# Altium PCB SparkFun_STUSB4500_USB-PD.PcbDoc
Units mm, origin at the board's own origin, x right, y up, seen from the top; angles counter-clockwise.
Board outline 35.56 x 33.02 mm, 2 copper layers (Top, Bottom); 76 components, 30 nets, 162 pads, 46 vias.
Unrouted connection lines stored in the file: 2.
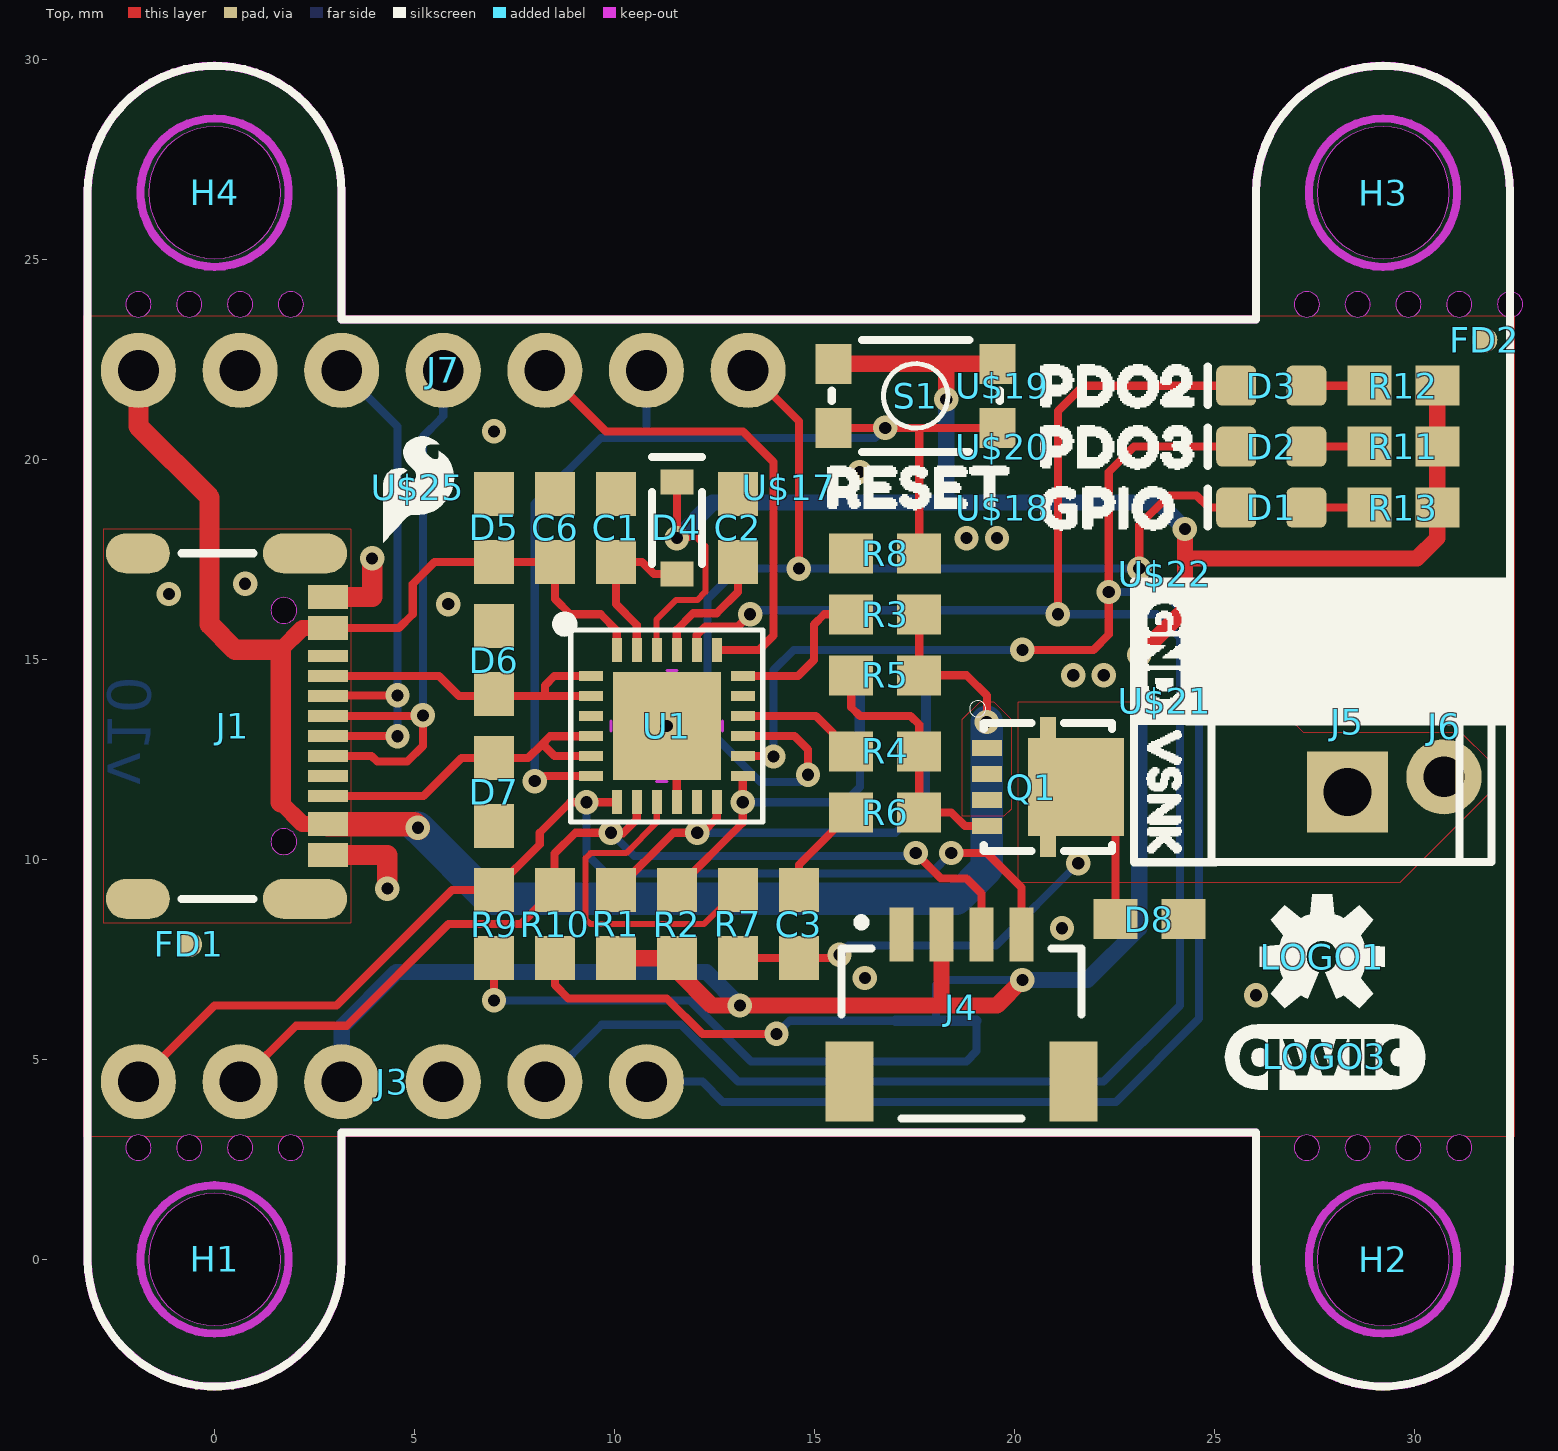
[diagram p0: Top view]
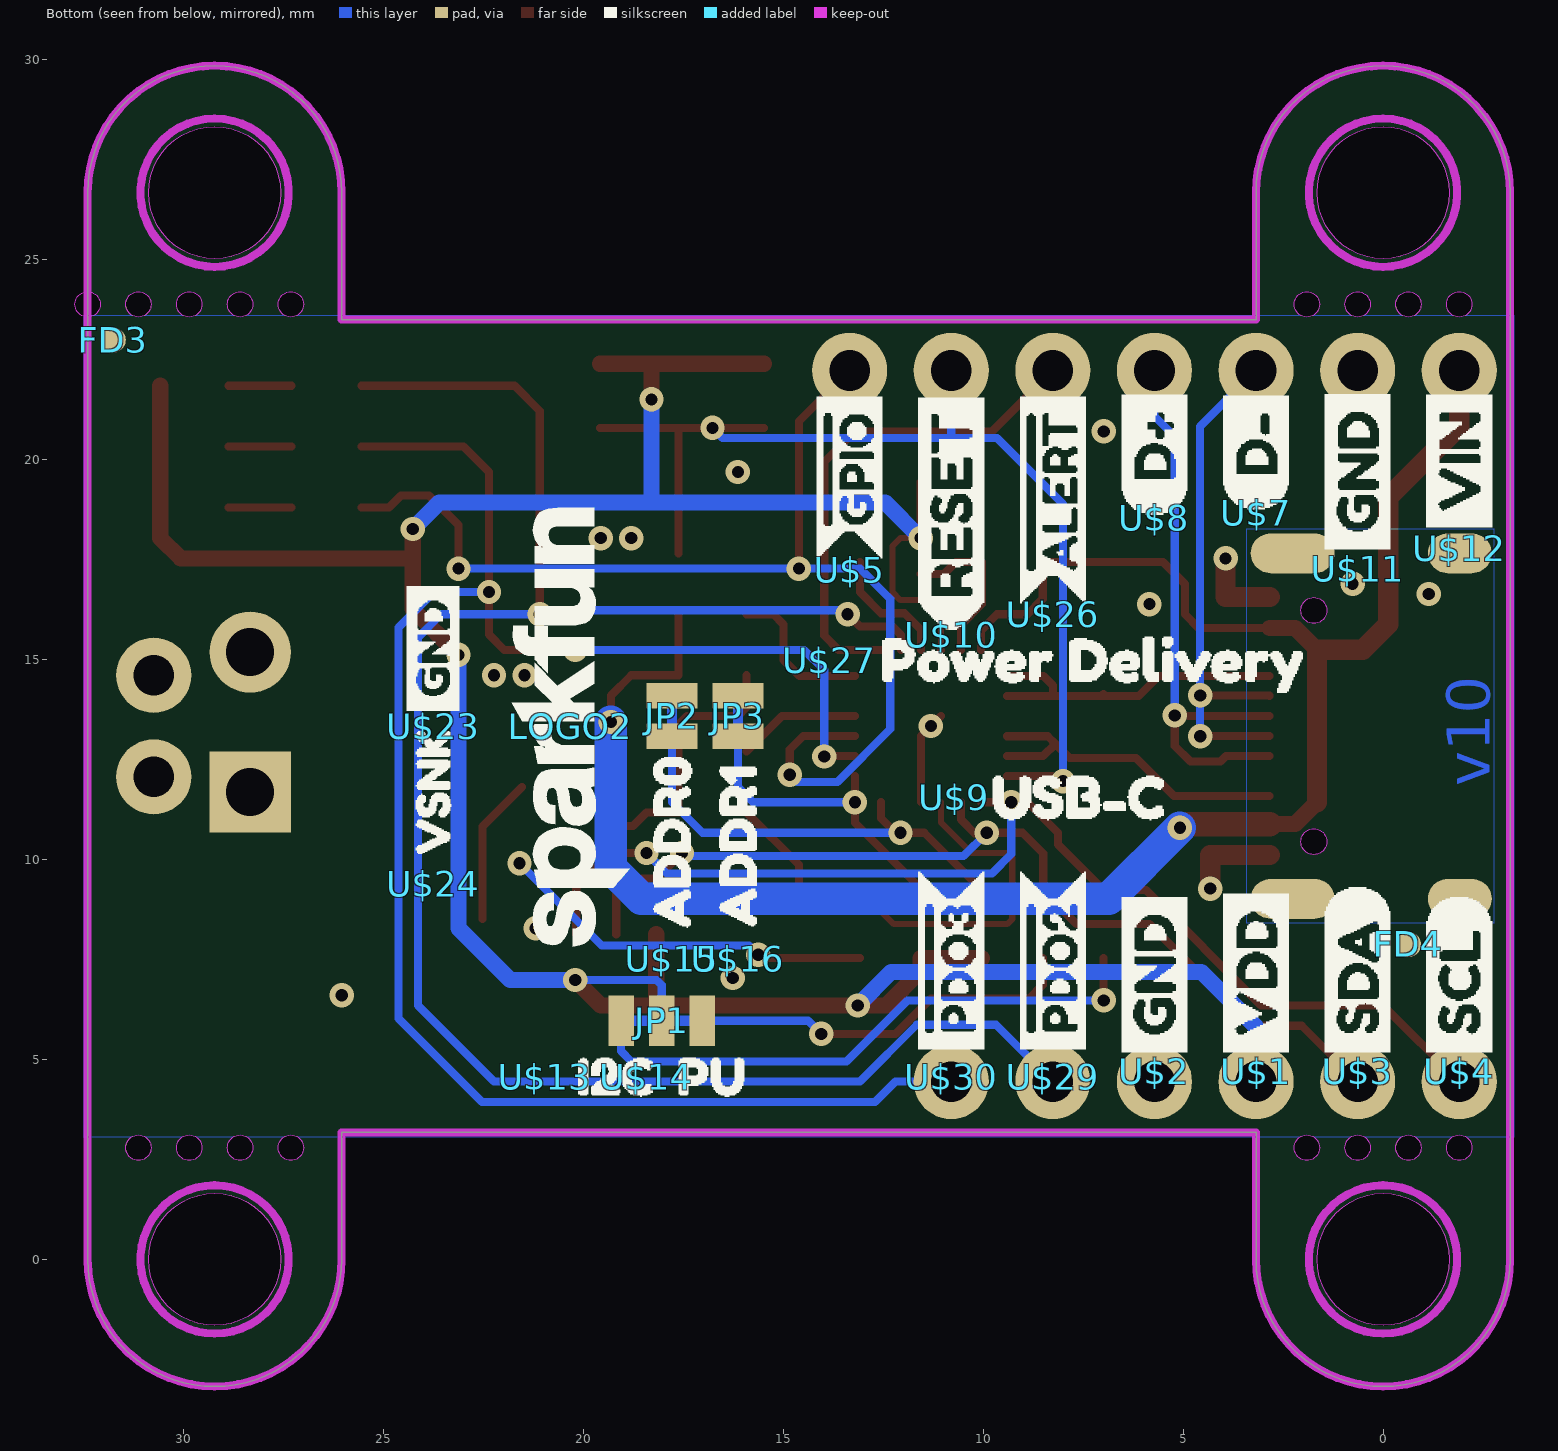
[diagram p1: Bottom view, seen from below]

## Layer stack, top to bottom
Top Solder: solder mask 0.0102, Solder Resist, Dk 3.5
Top: signal copper 0.035
Dielectric 1: dielectric 0.32, FR-4, Dk 4.8
Bottom: signal copper 0.035
Bottom Solder: solder mask 0.0102, Solder Resist, Dk 3.5

## Board outline
26.035,3.175 3.175,3.175 3.175,0 cw(c0,0) 0,-3.175 cw(c0,0) -3.175,0 -3.175,26.67 cw(c0,26.67) 0,29.845 cw(c0,26.67) 3.175,26.67 3.175,23.495 26.035,23.495 26.035,26.67 cw(c29.21,26.67) 29.21,29.845 cw(c29.21,26.67) 32.385,26.67 32.385,0 cw(c29.21,0) 29.21,-3.175 cw(c29.21,0) 26.035,0
cut-out: 0,-1.651 ccw(c0,0) 1.651,0 ccw(c0,0) 0,1.651 ccw(c0,0) -1.651,0 ccw(c0,0)
cut-out: 29.21,-1.651 ccw(c29.21,0) 30.861,0 ccw(c29.21,0) 29.21,1.651 ccw(c29.21,0) 27.559,0 ccw(c29.21,0)
cut-out: 0,25.019 ccw(c0,26.67) 1.651,26.67 ccw(c0,26.67) 0,28.321 ccw(c0,26.67) -1.651,26.67 ccw(c0,26.67)
cut-out: 29.21,25.019 ccw(c29.21,26.67) 30.861,26.67 ccw(c29.21,26.67) 29.21,28.321 ccw(c29.21,26.67) 27.559,26.67 ccw(c29.21,26.67)
cut-out: 1.73,15.9 ccw(c1.73,16.225) 2.055,16.225 ccw(c1.73,16.225) 1.73,16.55 ccw(c1.73,16.225) 1.405,16.225 ccw(c1.73,16.225)
cut-out: 1.73,10.12 ccw(c1.73,10.445) 2.055,10.445 ccw(c1.73,10.445) 1.73,10.77 ccw(c1.73,10.445) 1.405,10.445 ccw(c1.73,10.445)
cut-out: 28.575,23.558 ccw(c28.575,23.876) 28.892,23.876 ccw(c28.575,23.876) 28.575,24.194 ccw(c28.575,23.876) 28.258,23.876 ccw(c28.575,23.876)
cut-out: -1.905,23.558 ccw(c-1.905,23.876) -1.587,23.876 ccw(c-1.905,23.876) -1.905,24.194 ccw(c-1.905,23.876) -2.222,23.876 ccw(c-1.905,23.876)
cut-out: 29.845,23.558 ccw(c29.845,23.876) 30.162,23.876 ccw(c29.845,23.876) 29.845,24.194 ccw(c29.845,23.876) 29.527,23.876 ccw(c29.845,23.876)
cut-out: 27.305,23.558 ccw(c27.305,23.876) 27.622,23.876 ccw(c27.305,23.876) 27.305,24.194 ccw(c27.305,23.876) 26.987,23.876 ccw(c27.305,23.876)
cut-out: 31.115,23.558 ccw(c31.115,23.876) 31.432,23.876 ccw(c31.115,23.876) 31.115,24.194 ccw(c31.115,23.876) 30.797,23.876 ccw(c31.115,23.876)
cut-out: 32.385,23.558 ccw(c32.385,23.876) 32.703,23.876 ccw(c32.385,23.876) 32.385,24.194 ccw(c32.385,23.876) 32.067,23.876 ccw(c32.385,23.876)
cut-out: 1.905,2.476 ccw(c1.905,2.794) 2.222,2.794 ccw(c1.905,2.794) 1.905,3.111 ccw(c1.905,2.794) 1.587,2.794 ccw(c1.905,2.794)
cut-out: 29.845,2.476 ccw(c29.845,2.794) 30.162,2.794 ccw(c29.845,2.794) 29.845,3.111 ccw(c29.845,2.794) 29.527,2.794 ccw(c29.845,2.794)
cut-out: 0.635,2.476 ccw(c0.635,2.794) 0.953,2.794 ccw(c0.635,2.794) 0.635,3.111 ccw(c0.635,2.794) 0.318,2.794 ccw(c0.635,2.794)
cut-out: -0.635,2.476 ccw(c-0.635,2.794) -0.318,2.794 ccw(c-0.635,2.794) -0.635,3.111 ccw(c-0.635,2.794) -0.953,2.794 ccw(c-0.635,2.794)
cut-out: -1.905,2.476 ccw(c-1.905,2.794) -1.587,2.794 ccw(c-1.905,2.794) -1.905,3.111 ccw(c-1.905,2.794) -2.222,2.794 ccw(c-1.905,2.794)
cut-out: 28.575,2.476 ccw(c28.575,2.794) 28.892,2.794 ccw(c28.575,2.794) 28.575,3.111 ccw(c28.575,2.794) 28.258,2.794 ccw(c28.575,2.794)
cut-out: -0.635,23.558 ccw(c-0.635,23.876) -0.318,23.876 ccw(c-0.635,23.876) -0.635,24.194 ccw(c-0.635,23.876) -0.953,23.876 ccw(c-0.635,23.876)
cut-out: 0.635,23.558 ccw(c0.635,23.876) 0.953,23.876 ccw(c0.635,23.876) 0.635,24.194 ccw(c0.635,23.876) 0.318,23.876 ccw(c0.635,23.876)
cut-out: 1.905,23.558 ccw(c1.905,23.876) 2.222,23.876 ccw(c1.905,23.876) 1.905,24.194 ccw(c1.905,23.876) 1.587,23.876 ccw(c1.905,23.876)
cut-out: 27.305,2.476 ccw(c27.305,2.794) 27.622,2.794 ccw(c27.305,2.794) 27.305,3.111 ccw(c27.305,2.794) 26.987,2.794 ccw(c27.305,2.794)
cut-out: 31.115,2.476 ccw(c31.115,2.794) 31.432,2.794 ccw(c31.115,2.794) 31.115,3.111 ccw(c31.115,2.794) 30.797,2.794 ccw(c31.115,2.794)

## Design rules (kind name [scope] priority, off if disabled: settings)
BoardOutlineClearance mdCopperDimension [All] p1: gap=0.254 ignorepadtopadclearanceinfootprint=FALSE except(0: Arc-SplitContinuation Track-SplitContinuation SMDPad-SplitContinuation THPad-SplitContinuation Via-SplitContinuation Fill-SplitContinuation Poly-SplitContinuation Region-SplitContinuation Text-SplitContinuation; 0.102: Poly-OutlineEdge Poly-CavityEdge Poly-CutoutEdge Poly-SplitBarrior)
Clearance Clearance_for_PolygonClass_Isolate_8 [InPolygonClass('Isolate_8') vs IsArc Or IsTrack Or IsPad Or IsVia Or IsFill Or IsRegion Or IsText] p1: gap=0.203 ignorepadtopadclearanceinfootprint=FALSE
Clearance Clearance_for_PolygonClass_Isolate_6 [InPolygonClass('Isolate_6') vs IsArc Or IsTrack Or IsPad Or IsVia Or IsFill Or IsRegion Or IsText] p2: gap=0.152 ignorepadtopadclearanceinfootprint=FALSE
Clearance "Clearance (Same Net)" [All] p3: gap=0.102 ignorepadtopadclearanceinfootprint=FALSE
Clearance [All] p4: gap=0.102 ignorepadtopadclearanceinfootprint=FALSE
HoleSize [All] p1: absolutevalues=TRUE maxlimit=2540 minlimit=0.152 maxpercent=80.000 minpercent=20.000
HoleToHoleClearance mdDrill [All] p1: gap=0.102 allowstackedmicrovias=TRUE
MinimumSolderMaskSliver [All] p1 off: minsoldermaskwidth=0.254
PasteMaskExpansion Expansion_SMDPaste_OFF [InPadClass('SMDPaste_OFF')] p1: expansion=0
PasteMaskExpansion mlMinCreamFrame [All] p2: expansion=0
PolygonConnect PolygonConnect_For_PolygonThermal_ON_Width80000_Gap100000 [InPolygonClass('PolygonThermal_ON_Width80000_Gap100000') vs Not IsVia] p1: connectstyle=Relief reliefconductorwidth=0.203 reliefentries=4 polygonreliefangle="90 Angle" airgapwidth=0.254
PolygonConnect PolygonConnect_For_PolygonThermal_OFF [InPolygonClass('PolygonThermal_OFF')] p2: connectstyle=Direct reliefconductorwidth=0.254 reliefentries=4 polygonreliefangle="90 Angle" airgapwidth=0.254
PolygonConnect ThermalVias [IsVia] p3: connectstyle=Direct reliefconductorwidth=0.254 reliefentries=4 polygonreliefangle="90 Angle" airgapwidth=0.254
PolygonConnect [All] p4: connectstyle=Relief reliefconductorwidth=0.254 reliefentries=4 polygonreliefangle="90 Angle" airgapwidth=0.254
RoutingVias [All] p1: holewidth=0.152 width=0.406 viastyle="Through Hole" minholewidth=0.152 minwidth=0.406 maxholewidth=2.54 maxwidth=2.54
SolderMaskExpansion Expansion_SMDSolder_OFF [InPadClass('SMDSolder_OFF')] p1: expansion=0 istentingtop=FALSE
SolderMaskExpansion mlMinStopFrame [All] p2: expansion=0.102 istentingtop=FALSE
Width [All] p1: maxlimit=0.254 minlimit=0.102 preferedwidth=0.102
26 further rules are at their usual default settings.

## Classes and differential pairs
polygon class PolygonThermal_ON_Width80000_Gap100000: Polygon_1_Net_GND Polygon_2_Net_GND
polygon class PolygonThermal_OFF: Polygon_1_Net_SHIELD Polygon_1_Net_VIN Polygon_1_Net_VSNK Polygon_2_Net_SHIELD
polygon class Isolate_8: Polygon_1_Net_GND Polygon_1_Net_SHIELD Polygon_1_Net_VSNK Polygon_2_Net_GND Polygon_2_Net_SHIELD
polygon class Isolate_6: Polygon_1_Net_VIN
pad class SMDSolder_OFF: J1-SHLD1 J1-SHLD2 J1-SHLD3 J1-SHLD4 J1-SHLD5 J1-SHLD6 J1-SHLD7 J1-SHLD8
pad class SMDPaste_OFF: FD1-1 FD2-1 FD3-1 FD4-1 J1-SHLD1 J1-SHLD2 J1-SHLD3 J1-SHLD4 J1-SHLD5 J1-SHLD6 J1-SHLD7 J1-SHLD8 JP1-1 JP1-2 JP1-3 JP2-1 JP2-2 JP3-1 JP3-2 U1-P$1 U1-P$2 U1-P$3 U1-P$4 U1-P$5 U1-P$6 U1-P$7 U1-P$8 U1-P$9 U1-P$10 U1-P$11 U1-P$12 U1-P$13 U1-P$14 U1-P$15 U1-P$16 U1-P$17 U1-P$18 U1-P$19 U1-P$20 U1-P$21 U1-P$22 U1-P$23 U1-P$24 U1-P$25

## Components (designator, comment, footprint, x,y, rotation, side; value= is the part's Value field where it differs from the comment)
C1 "1.0uF" 0603 10.033,18.288 r90 top
C2 "1.0uF" 0603 13.081,18.288 r90 top
C3 "0.1uF" 0603 14.605,8.382 r90 top
C6 "1.0uF" 0603 8.509,18.288 r90 top
D1 "BLUE" LED-0603 26.416,18.796 r180 top
D2 "Yellow" LED-0603 26.416,20.32 r180 top
D3 "GREEN" LED-0603 26.416,21.844 r180 top
D4 "BAT60A" SOD-323 11.557,18.288 r270 top
D5 "24V" 0603 6.985,18.288 r270 top
D6 "24V" 0603 6.985,14.986 r270 top
D7 "24V" 0603 6.985,11.684 r90 top
D8 "24V" 0603 23.368,8.509 r180 top
FD1 "" FIDUCIAL-MICRO -0.635,7.874 r0 top
FD2 "" FIDUCIAL-MICRO 31.75,22.987 r0 top
FD3 "" FIDUCIAL-MICRO 31.75,22.987 r180 bottom
FD4 "" FIDUCIAL-MICRO -0.635,7.874 r180 bottom
H1 "STAND-OFF" STAND-OFF 0,0 r0 top
H2 "STAND-OFF" STAND-OFF 29.21,0 r0 top
H3 "STAND-OFF" STAND-OFF 29.21,26.67 r0 top
H4 "STAND-OFF" STAND-OFF 0,26.67 r0 top
J1 "" USB-C-16P 3.175,13.335 r270 top
J3 "" 1X06_NO_SILK -1.905,4.445 r0 top
J4 "QWIIC" JST04_1MM_RA 18.669,8.128 r0 top
J5 "" SCREWTERMINAL-3.5MM-2 28.321,11.684 r90 top
J6 "" 1X02_NO_SILK 30.734,12.065 r90 top
J7 "" 1X07_NO_SILK -1.905,22.225 r0 top
JP1 "" SMT-JUMPER_3_2-NC_TRACE_NO-SILK 18.034,5.969 r0 bottom
JP2 "" SMT-JUMPER_2_NC_TRACE_NO-SILK 17.78,13.589 r270 bottom
JP3 "" SMT-JUMPER_2_NC_TRACE_NO-SILK 16.129,13.589 r270 bottom
LOGO1 "" OSHW-LOGO-S 27.686,7.569 r0 top
LOGO2 "" SFE_LOGO_NAME_.1 20.32,13.335 r90 bottom
LOGO3 "" QWIIC_5MM 27.737,5.08 r0 top
Q1 "9A/30V/15mΩ" 8-POWERVDFN-3X3 20.828,11.811 r270 top
R1 "100k" 0603 10.033,8.382 r270 top
R2 "100k" 0603 11.557,8.382 r270 top
R3 "1k" 0603 16.764,16.129 r0 top
R4 "22k" 0603 16.764,12.7 r0 top
R5 "100k" 0603 16.764,14.605 r0 top
R6 "100" 0603 16.764,11.176 r180 top
R7 "1k" 0603 13.081,8.382 r90 top
R8 "100k" 0603 16.764,17.653 r0 top
R9 "2.2k" 0603 6.985,8.382 r270 top
R10 "2.2k" 0603 8.509,8.382 r270 top
R11 "1k" 0603 29.718,20.32 r0 top
R12 "1k" 0603 29.718,21.844 r0 top
R13 "1k" 0603 29.718,18.796 r0 top
S1 "" TACTILE_SWITCH_SMD_4.6X2.8MM 17.526,21.59 r180 top
U1 "" QFN-24 11.303,13.335 r0 top
U$1 "" VDD2 3.175,4.699 r90 bottom
U$2 "" GND6 5.715,4.699 r90 bottom
U$3 "" SDA11 0.635,4.699 r90 bottom
U$4 "" SCL12 -1.905,4.699 r90 bottom
U$5 "" #GPIO0 13.335,17.247 r90 bottom
U$7 "" D#8 3.175,18.669 r90 bottom
U$8 "" D#7 5.715,18.542 r90 bottom
U$9 "" USB#C1 10.719,11.557 r180 bottom
U$10 "" RESET10 10.795,15.621 r90 bottom
U$11 "" GND6 0.635,17.272 r90 bottom
U$12 "" VIN6 -1.905,17.78 r90 bottom
U$13 "" I2C2 20.955,4.572 r180 bottom
U$14 "" PU3 18.415,4.572 r180 bottom
U$15 "" ADDR00 17.78,7.518 r90 bottom
U$16 "" ADDR11 16.129,7.518 r90 bottom
U$17 "" RESET7 14.351,19.304 r0 top
U$18 "" GPIO1 19.685,18.796 r0 top
U$19 "" PDO24 19.685,21.844 r0 top
U$20 "" PDO35 19.685,20.32 r0 top
U$21 "" VSNK1 23.749,13.97 r270 top
U$22 "" GND0 23.749,17.145 r270 top
U$23 "" GND0 23.749,13.335 r90 bottom
U$24 "" VSNK1 23.749,9.398 r90 bottom
U$25 "" SFE_LOGO_FLAME_.1 5.08,19.304 r0 top
U$26 "" #ALERT0 8.255,16.129 r90 bottom
U$27 "" _POWER_DELIVERY2 13.843,14.986 r180 bottom
U$29 "" #PDO20 8.255,4.572 r90 bottom
U$30 "" #PDO31 10.795,4.572 r90 bottom

## Footprints (in the part's own frame and the unit in brackets; to place one, negate y for a bottom-side part, rotate by r counter-clockwise, add the part's x,y. Pads: shape width x height; smd on the part's side, far side on the other; paste and mask are expansions set on the pad)
1X02_NO_SILK [mil] "1X02_NO_SILK"
  round 74 hole 40: 1(0,0) 2(100,0)
1X06_NO_SILK [mil] "1X06_NO_SILK"
  round 74 hole 40: 1(0,0) 2(100,0) 3(200,0) 4(300,0) 5(400,0) 6(500,0)
1X07_NO_SILK [mil] "1X07_NO_SILK"
  round 74 hole 40: 1(0,0) 2(100,0) 3(200,0) 4(300,0) 5(400,0) 6(500,0) 7(600,0)
8-POWERVDFN-3X3 [mm] "8-POWERVDFN-3X3"
  rect 0.4x0.75 smd: 1(-0.975,-1.525) 2(-0.325,-1.525) 3(0.325,-1.525) 4(0.975,-1.525)
  rect 2.45x2.4 smd: 5@1(0,0.7)
  rect 0.53x0.4 smd: 5@2(-1.49,0) 5@3(1.49,0)
  silkscreen extent -2.16,-1.96 1.6,1.6
0603 [mm] "0603"
  rect 1.1x1 smd: 1(-0.85,0) 2(0.85,0)
  keep` keep-out lines w0.051: -1.6,0.7 -1.6,-0.7 1.6,-0.7 1.6,0.7 -1.6,0.7
#ALERT0 [mm] "#ALERT0"
  silkscreen extent 0.28,-0.82 5.44,0.82
#GPIO0 [mm] "#GPIO0"
  silkscreen extent 0.28,-0.82 4.32,0.82
#PDO20 [mm] "#PDO20"
  silkscreen extent 0.68,-0.82 5.12,0.82
#PDO31 [mm] "#PDO31"
  silkscreen extent 0.68,-0.82 5.12,0.82
_POWER_DELIVERY2 [mm] "_POWER_DELIVERY2"
  silkscreen extent 1.32,-0.82 11.84,0.58
ADDR00 [mm] "ADDR00"
  silkscreen extent 0.77,-0.51 5.04,0.47
ADDR11 [mm] "ADDR11"
  silkscreen extent 0.81,-0.47 4.8,0.47
D#7 [mm] "D#7"
  silkscreen extent 0.08,-0.82 3.08,0.82
D#8 [mm] "D#8"
  silkscreen extent 0.08,-0.82 2.92,0.82
FIDUCIAL-MICRO [mm] "FIDUCIAL-MICRO"
  rrect100% 0.635x0.635 smd paste+0: 1(0,0)
GND0 [mm] "GND0"
  silkscreen extent 0.38,-0.66 3.49,0.66
GND6 [mm] "GND6"
  silkscreen extent 0.48,-0.82 4.36,0.82
GPIO1 [mm] "GPIO1"
  silkscreen extent 0.92,-0.58 4.32,0.54
I2C2 [mm] "I2C2"
  silkscreen extent 0.84,-0.51 2.7,0.47
JST04_1MM_RA [mm] "JST04_1MM_RA"
  rect 0.6x1.35 smd: 1(-1.5,0) 2(-0.5,0) 3(0.5,0) 4(1.5,0)
  rect 1.2x2 smd: NC1(2.8,-3.675) NC2(-2.8,-3.675)
  silkscreen extent -3,-4.6 3,0.4
LED-0603 [mm] "LED-0603"
  rrect30% 1x1 smd: A(-0.877,0) C(0.877,0)
  silkscreen extent 1.59,-0.48 1.59,0.48
OSHW-LOGO-S [mm] "OSHW-LOGO-S"
  silkscreen extent -1.56,-1.28 1.56,1.56
PDO24 [mm] "PDO24"
  silkscreen extent 0.96,-0.58 4.8,0.54
PDO35 [mm] "PDO35"
  silkscreen extent 0.96,-0.58 4.8,0.54
PU3 [mm] "PU3"
  silkscreen extent 0.81,-0.51 2.45,0.47
QFN-24 [mm] "QFN-24"
  rect 0.6x0.25 smd paste+0: P$1(-1.9,1.25) P$2(-1.9,0.75) P$3(-1.9,0.25) P$4(-1.9,-0.25) P$5(-1.9,-0.75) P$6(-1.9,-1.25) P$13(1.9,-1.25) P$14(1.9,-0.75) P$15(1.9,-0.25) P$16(1.9,0.25) P$17(1.9,0.75) P$18(1.9,1.25)
  rect 0.25x0.6 smd paste+0: P$7(-1.25,-1.9) P$8(-0.75,-1.9) P$9(-0.25,-1.9) P$10(0.25,-1.9) P$11(0.75,-1.9) P$12(1.25,-1.9) P$19(1.25,1.9) P$20(0.75,1.9) P$21(0.25,1.9) P$22(-0.25,1.9) P$23(-0.75,1.9) P$24(-1.25,1.9)
  rect 2.7x2.7 smd paste+0: P$25(0,0)
  silkscreen extent -2.86,-2.4 2.4,2.86
QWIIC_5MM [mm] "QWIIC_5MM"
  silkscreen extent -2.48,-0.83 2.53,0.8
RESET7 [mm] "RESET7"
  silkscreen extent 0.96,-0.58 5.52,0.54
RESET10 [mm] "RESET10"
  silkscreen extent 0.12,-0.82 5.92,0.82
SCL12 [mm] "SCL12"
  silkscreen extent 0.48,-0.82 4.36,0.82
SCREWTERMINAL-3.5MM-2 [mil] "SCREWTERMINAL-3.5MM-2"
  rect 80x80 / inner round 73.91 / far side rect 80x80 hole 47.24: 1(0,0)
  round 80 hole 47.24: 2(137.8,0)
  silkscreen extent -69,-142 207,134
SDA11 [mm] "SDA11"
  silkscreen extent 0.48,-0.82 4.6,0.82
SFE_LOGO_FLAME_.1 [mm] "SFE_LOGO_FLAME_.1"
  silkscreen extent -0.86,-1.38 0.91,1.28
SFE_LOGO_NAME_.1 [mm] "SFE_LOGO_NAME_.1"
  silkscreen extent -5.51,-1.48 5.46,1.46
SMT-JUMPER_2_NC_TRACE_NO-SILK [mil] "SMT-JUMPER_2_NC_TRACE_NO-SILK"
  rect 25x50 smd paste+0: 1(-20,0) 2(20,0)
  Top lines w10: 20,0 -20,0
SMT-JUMPER_3_2-NC_TRACE_NO-SILK [mil] "SMT-JUMPER_3_2-NC_TRACE_NO-SILK"
  rect 25x50 smd paste+0: 1(-40,0) 2(0,0) 3(40,0)
  Top lines w10: -40,0 0,0 40,0
SOD-323 [mm] "SOD-323"
  rect 0.63x0.83 smd: A(1.15,0) C(-1.15,0)
  silkscreen extent -1.77,-0.63 0.9,0.63
STAND-OFF [mm] "STAND-OFF"
  Top keep-out lines w0.203: 0,-1.854 cw(c0,0) 0,1.854 cw(c0,0) 0,-1.854
  Bottom keep-out lines w0.203: 0,-1.854 cw(c0,0) 0,1.854 cw(c0,0) 0,-1.854
  keep` keep-out circle w0.127: c0,0 r2.794
TACTILE_SWITCH_SMD_4.6X2.8MM [mm] "TACTILE_SWITCH_SMD_4.6X2.8MM"
  rect 0.9x1 smd: 1(-2.05,-0.8) 2(2.05,-0.8) 3(2.05,0.8) 4(-2.05,0.8)
  silkscreen extent -2.1,-1.4 2.1,1.4
USB#C1 [mm] "USB#C1"
  silkscreen extent 0.96,-0.58 5.24,0.54
USB-C-16P [mm] "USB-C-16P"
  rect 0.3x1 smd: A5(-1.25,-0.34) A6(-0.25,-0.34) A7(0.25,-0.34) A8(1.25,-0.34) B5(1.75,-0.34) B6(0.75,-0.34) B7(-0.75,-0.34) B8(-1.75,-0.34)
  rect 0.6x1 smd: GND(-3.225,-0.34) GND2(3.225,-0.34) VBUS1(-2.45,-0.34) VBUS2(2.45,-0.34)
  rrect100% 1x2.1 smd paste+0 mask+0: SHLD1(-4.32,-0.915) SHLD2(4.32,-0.915)
  rrect100% 1x2.1 smd far side paste+0 mask+0: SHLD3(-4.32,-0.915) SHLD4(4.32,-0.915)
  rrect100% 1x1.6 smd paste+0 mask+0: SHLD5(-4.32,-5.095) SHLD8(4.32,-5.095)
  rrect100% 1x1.6 smd far side paste+0 mask+0: SHLD6(-4.32,-5.095) SHLD7(4.32,-5.095)
  silkscreen extent -4.32,-4 4.32,-2.2
VDD2 [mm] "VDD2"
  silkscreen extent 0.48,-0.82 4.44,0.82
VIN6 [mm] "VIN6"
  silkscreen extent 0.52,-0.82 3.84,0.82
VSNK1 [mm] "VSNK1"
  silkscreen extent 0.74,-0.46 3.81,0.43

## Part data
C1 C2 C3 C6 D5 D6 D7 D8 R1 R2 R3 R4 R5 R6 R7 R8 R9 R10 R11 R12 R13: library part 0603, PackageName=0603
D1 D2 D3: library part LED-0603, PackageName=LED-0603
D4: library part SOD-323, PackageName=SOD-323
FD1 FD2 FD3 FD4: library part FIDUCIAL-MICRO, PackageName=FIDUCIAL-MICRO
J1: library part USB-C-16P, PackageName=USB-C-16P
J3: library part 1X06_NO_SILK, PackageName=1X06_NO_SILK
J4: library part JST04_1MM_RA, PackageName=JST04_1MM_RA
J5: library part SCREWTERMINAL-3.5MM-2, PackageName=SCREWTERMINAL-3.5MM-2
J6: library part 1X02_NO_SILK, PackageName=1X02_NO_SILK
J7: library part 1X07_NO_SILK, PackageName=1X07_NO_SILK
JP1: library part SMT-JUMPER_3_2-NC_TRACE_NO-SILK, PackageName=SMT-JUMPER_3_2-NC_TRACE_NO-SILK
JP2 JP3: library part SMT-JUMPER_2_NC_TRACE_NO-SILK, PackageName=SMT-JUMPER_2_NC_TRACE_NO-SILK
LOGO1: library part OSHW-LOGO-S, PackageName=OSHW-LOGO-S
LOGO2: library part SFE_LOGO_NAME_.1, PackageName=SFE_LOGO_NAME_.1
LOGO3: library part QWIIC_5MM, PackageName=QWIIC_5MM
Q1: library part 8-POWERVDFN-3X3, PackageName=8-POWERVDFN-3X3
S1: library part TACTILE_SWITCH_SMD_4.6X2.8MM, PackageName=TACTILE_SWITCH_SMD_4.6X2.8MM
U1: library part QFN-24, PackageName=QFN-24
U$1: library part VDD2, PackageName=VDD2
U$2 U$11: library part GND6, PackageName=GND6
U$3: library part SDA11, PackageName=SDA11
U$4: library part SCL12, PackageName=SCL12
U$5: library part #GPIO0, PackageName=#GPIO0
U$7: library part D#8, PackageName=D#8
U$8: library part D#7, PackageName=D#7
U$9: library part USB#C1, PackageName=USB#C1
U$10: library part RESET10, PackageName=RESET10
U$12: library part VIN6, PackageName=VIN6
U$13: library part I2C2, PackageName=I2C2
U$14: library part PU3, PackageName=PU3
U$15: library part ADDR00, PackageName=ADDR00
U$16: library part ADDR11, PackageName=ADDR11
U$17: library part RESET7, PackageName=RESET7
U$18: library part GPIO1, PackageName=GPIO1
U$19: library part PDO24, PackageName=PDO24
U$20: library part PDO35, PackageName=PDO35
U$21 U$24: library part VSNK1, PackageName=VSNK1
U$22 U$23: library part GND0, PackageName=GND0
U$25: library part SFE_LOGO_FLAME_.1, PackageName=SFE_LOGO_FLAME_.1
U$26: library part #ALERT0, PackageName=#ALERT0
U$27: library part _POWER_DELIVERY2, PackageName=_POWER_DELIVERY2
U$29: library part #PDO20, PackageName=#PDO20
U$30: library part #PDO31, PackageName=#PDO31
H1 H2 H3 H4: PackageName=STAND-OFF

## Free pads (board coordinates)
  round 3.302 hole 3.302 unplated: MH1(0,0) MH1(0,26.67) MH1(29.21,0) MH1(29.21,26.67)
  round 0.635 hole 0.635 unplated: MH1(0.635,2.794) MH2(-0.635,2.794) MH3(-1.905,2.794) MH5(1.905,2.794) MH7(29.845,2.794) MH8(28.575,2.794) MH9(27.305,2.794) MH11(31.115,2.794) MH13(-0.635,23.876) MH14(0.635,23.876) MH15(1.905,23.876) MH17(-1.905,23.876) MH19(28.575,23.876) MH20(29.845,23.876) MH21(31.115,23.876) MH23(27.305,23.876)
  round 0.65 hole 0.65 unplated: MH1(1.73,16.225) MH2(1.73,10.445)

## Via types
v1: diameter 0.61/0.61 (per signal layer), hole 0.305, Top to Bottom, 46 vias

## Nets (pads, with @x,y where several pads share a name; then routed paths per layer and width w, separated by ;. In a path a pad name is that pad's centre, name@x,y a point inside that pad or via, vN(x,y) a via of type N, cw(c..) or ccw(c..) an arc to the next point about the centre after c; other vN are vias at no path point)
1.2V: C2.1 U1.P$21 | length 3.2
  Top w0.203: U1.P$21 11.553,15.744 11.963,16.154 12.551,16.154 13.081,16.684 C2.1
2.7V: C1.1 D4.A U1.P$23 | length 4.1
  Top w0.203: U1.P$23 10.553,15.863 10.033,16.383 C1.1 10.68,17.438 10.98,17.138 D4.A
!ALERT: J7.5 U1.P$19 | length 12.6
  Top w0.203: J7.5 9.779,20.701 13.208,20.701 13.97,19.939 13.97,15.596 13.609,15.235 U1.P$19
ADDR0: JP2.2 R1.1 U1.P$12 | length 11.4
  Top w0.203: R1.1 11.469,10.668 v1(12.065,10.668) 12.192,10.668 12.553,11.029 U1.P$12
  Bottom w0.203: v1(12.065,10.668) 17.018,10.668 17.78,11.43 JP2.2
ADDR1: JP3.2 R2.1 U1.P$13 | length 7.9
  Top w0.203: R2.1 11.557,9.271 13.203,10.917 v1(13.203,11.43) U1.P$13
  Bottom w0.203: v1(13.203,11.43) 15.748,11.43 16.129,11.811 JP3.2
CC1: D6.2 J1.A5 U1.P$1 U1.P$2 | length 8.4
  Top w0.203: J1.A5 5.608,14.585 6.108,14.085 D6.2@7.036,14.085 ; D6.2 D6.2@7.036,14.085 ; U1.P$2 8.255,14.085 ; U1.P$1 8.489,14.585 8.255,14.351 8.255,14.085 ; D6.2@7.036,14.085 8.255,14.085
CC2: D7.2 J1.B5 U1.P$4 U1.P$5 | length 8.5
  Top w0.203: J1.B5 5.223,11.585 6.172,12.534 D7.2 7.835,12.534 8.191,12.89 ; U1.P$5 8.497,12.585 8.191,12.89 ; U1.P$4 9.399,13.081 8.382,13.081 8.191,12.89
D+: J1.A6 J1.B6 J7.4 | length 14.6
  Top w0.203: J1.B6 3.925,12.585 4.064,12.446 4.814,12.446 5.207,12.839 v1(5.207,13.601) 5.195,13.589 4.064,13.589 4.064,13.585 J1.A6
  Bottom w0.203: v1(5.207,13.601) 5.207,20.574 5.651,21.018 5.715,21.082 J7.4
D-: J1.A7 J1.B7 J7.3 | length 13.2
  Top w0.203: J1.A7 4.572,13.085 v1(4.572,13.081) ; J1.B7 2.835,14.102 v1(4.572,14.102)
  Bottom w0.203: J7.3 4.572,20.828 v1(4.572,14.102) v1(4.572,13.081)
DISCH: R7.2 U1.P$9 | length 8.4
  Top w0.152: U1.P$9 11.053,10.926 10.287,10.16 9.398,10.16 9.271,10.033 9.271,8.509 9.398,8.382 12.231,8.382 R7.2
EN_SNK: R4.1 U1.P$16 | length 3.1
  Top w0.203: U1.P$16 15.029,13.585 R4.1
GND: C1.2 C2.2 C6.2 D5.1 D6.1 D7.1 D8.1 J1.GND J1.GND2 J3.4 J4.1 J5.2 J6.2 J7.2 JP2.1 JP3.1 R8.1 U1.P$10 U1.P$25 | length 6.7
  Top w0.203: U1.P$25@11.053,13.585 v1(11.303,13.335) 11.553,13.085 U1.P$10
  Top w0.508: J1.GND2 4.318,10.11 v1(4.318,9.271) ; J1.GND 3.937,16.56 v1(3.937,17.526)
  other v1: 26.035,6.604 16.256,7.036 21.184,8.28 21.463,14.605 22.225,14.605 5.842,16.383 18.796,18.034 19.558,18.034 16.129,19.685 6.985,20.701
GPIO: D1.C J7.7 U1.P$15 | length 29.3
  Top w0.203: U1.P$15 14.496,13.085 14.834,12.747 v1(14.834,12.116) ; J7.7 14.605,20.955 v1(14.605,17.272) ; v1(23.114,17.272) 23.114,18.361 23.854,19.101 24.548,19.101 24.853,18.796 D1.C
  Bottom w0.203: v1(14.834,12.116) 14.656,11.938 13.64,11.938 12.319,13.259 12.319,16.51 13.081,17.272 v1(14.605,17.272) v1(23.114,17.272)
N$1: D2.A R11.1 | length 1.6
  Top w0.203: D2.A R11.1
N$2: D3.A R12.1 | length 1.6
  Top w0.203: D3.A R12.1
N$5: JP1.3 R9.2 | length 14.6
  Top w0.203: v1(6.985,6.477) R9.2
  Bottom w0.203: v1(6.985,6.477) 11.887,6.477 13.411,4.953 18.796,4.953 19.05,5.207 JP1.3
N$6: JP1.1 R10.2 | length 9.8
  Top w0.203: R10.2 8.509,6.858 8.839,6.528 11.303,6.528 12.192,5.639 v1(14.046,5.639)
  Bottom w0.203: v1(14.046,5.639) 14.376,5.969 JP1.1
N$8: Q1.4 R4.2 R5.1 R6.1 | length 6.7
  Top w0.203: R5.1 15.914,13.804 16.129,13.589 17.399,13.589 17.614,13.374 R4.2 R6.1 18.415,11.176 18.755,10.836 Q1.4
N$10: C3.2 R6.2 | length 2.5
  Top w0.203: C3.2 14.605,9.867 R6.2
N$13: D1.A R13.1 | length 1.6
  Top w0.203: D1.A R13.1
POWER_PDO2: D3.C J3.5 U1.P$20 | length 49.8
  Top w0.203: U1.P$20 12.053,15.609 12.268,15.824 13.081,15.824 v1(13.386,16.129) ; v1(21.082,16.129) 21.082,21.209 21.717,21.844 D3.C
  Bottom w0.203: J3.5 9.677,5.867 11.659,5.867 13.081,4.445 22.225,4.445 24.13,6.35 24.13,15.545 23.546,16.129 v1(21.082,16.129) 21.082,16.154 21.006,16.231 13.487,16.231 v1(13.386,16.129)
POWER_PDO3: D2.C J3.6 U1.P$14 | length 46.5
  Top w0.203: U1.P$14 13.97,12.585 v1(13.97,12.573) ; v1(20.193,15.24) 21.971,15.24 22.352,15.621 v1(22.352,16.688) 22.352,19.685 22.987,20.32 D2.C
  Bottom w0.203: J3.6 12.192,4.445 12.7,3.937 22.53,3.937 24.613,6.02 24.613,15.799 23.724,16.688 v1(22.352,16.688) ; v1(13.97,12.573) 13.97,14.732 14.478,15.24 v1(20.193,15.24)
RESET: J7.6 R8.2 S1.3 S1.4 U1.P$6 | length 26.9
  Top w0.203: v1(8.001,11.958) 8.133,11.958 8.26,12.085 U1.P$6 ; S1.3 v1(16.764,20.79) 17.614,20.79 ; R8.2 17.614,20.79 ; S1.4 17.614,20.79
  Bottom w0.203: v1(8.001,11.958) 8.001,18.885 9.652,20.536 10.795,20.536 ; J7.6 10.795,20.536 ; v1(16.764,20.79) 16.51,20.536 10.795,20.536
SCL: J3.1 J4.4 R9.1 U1.P$7 | length 29.1
  Top w0.203: J3.1 0,6.35 3.048,6.35 5.93,9.232 R9.1 8.128,10.375 8.128,10.668 8.89,11.43 v1(9.296,11.43) 10.048,11.43 U1.P$7 ; v1(18.415,10.16) 19.304,10.16 20.169,9.295 J4.4
  Bottom w0.203: v1(9.296,11.43) 9.296,10.135 9.779,9.652 17.907,9.652 v1(18.415,10.16)
SDA: J3.2 J4.3 R10.1 U1.P$8 | length 24.6
  Top w0.203: J3.2 2.032,5.842 3.302,5.842 5.842,8.382 7.659,8.382 R10.1 8.496,9.245 8.496,10.147 9.017,10.668 v1(9.906,10.668) 9.957,10.668 9.97,10.655 10.213,10.655 10.553,10.995 U1.P$8 ; v1(17.526,10.16) 18.161,9.525 18.796,9.525 19.169,9.152 J4.3
  Bottom w0.203: v1(9.906,10.668) 10.49,10.084 17.45,10.084 v1(17.526,10.16)
SHIELD: J1.SHLD1 J1.SHLD2 J1.SHLD3 J1.SHLD4 J1.SHLD5 J1.SHLD6 J1.SHLD7 J1.SHLD8
  other v1: -1.143,16.637 0.762,16.891
VBUS_VS_DISCH: R3.1 U1.P$18 | length 3.9
  Top w0.203: U1.P$18 14.585,14.585 14.986,14.986 14.986,15.875 15.24,16.129 R3.1
VDD: D4.C J3.3 J4.2 JP1.2 R1.2 R2.2 R11.2 R12.2 R13.2 S1.1 S1.2 U1.P$22 | length 79.7
  Top w0.152: U1.P$22@11.049,15.239 11.049,16.002 11.532,16.485 12.065,16.485 12.268,16.688 12.268,17.831 12.065,18.034 v1(11.557,18.034)
  Top w0.203: U1.P$22@11.049,15.239 U1.P$22 ; v1(11.557,18.034) D4.C
  Top w0.406: R1.2 R2.2 11.557,7.214 12.421,6.35 v1(13.132,6.35) 18.161,6.35 ; S1.2 18.288,22.39 ; J4.2 18.169,6.358 18.161,6.35 ; v1(18.288,21.501) 18.288,22.39 ; S1.1 18.288,22.39 ; v1(20.193,6.985) 19.558,6.35 18.161,6.35 ; v1(23.114,15.113) 24.257,16.256 v1(24.257,18.263) 24.257,17.526 30.06,17.526 30.568,18.034 R13.2 R11.2 R12.2
  Bottom w0.203: JP1.2 18.034,6.858 18.161,6.985 v1(20.193,6.985)
  Bottom w0.406: J3.3 3.175,5.817 4.547,7.188 12.294,7.188 v1(13.132,6.35) ; v1(11.557,18.034) 12.446,18.923 18.288,18.923 ; v1(18.288,21.501) 18.288,18.923 ; v1(20.193,6.985) 21.819,6.985 23.114,8.28 v1(23.114,15.113) ; v1(24.257,18.263) 23.597,18.923 18.288,18.923
VIN: C6.1 D5.2 J1.VBUS1 J1.VBUS2 J7.1 Q1.1 Q1.2 Q1.3 R3.2 R5.2 U1.P$24 | length 51.2
  Top w0.203: J1.VBUS1 4.609,15.785 4.953,16.129 4.953,16.891 5.5,17.438 D5.2 C6.1 8.509,16.51 8.89,16.129 9.652,16.129 10.053,15.728 U1.P$24 ; R3.2 R5.2 18.796,14.605 19.304,14.097 v1(19.304,13.437)
  Top w0.406: 1.651,11.43 2.196,10.885 J1.VBUS2 ; 1.651,15.24 2.196,15.785 J1.VBUS1
  Top w0.508: J7.1 -1.905,20.828 -0.127,19.05 -0.127,15.875 0.508,15.24 1.651,15.24 1.651,11.43
  Top w0.61: J1.VBUS2 4.99,10.885 v1(5.08,10.795)
  Bottom w0.813: v1(5.08,10.795) 6.858,9.017 18.542,9.017 19.304,9.779 v1(19.304,13.437)
VSNK: C3.1 D8.2 J5.1 J6.1 Q1.5@1 Q1.5@2 Q1.5@3 R7.1 | length 13.2
  Top w0.203: R7.1 C3.1 15.533,7.532 v1(15.621,7.62) ; 21.528,11.811 22.518,10.821 D8.2
  Bottom w0.203: v1(15.621,7.62) 15.85,7.849 19.533,7.849 v1(21.59,9.906)
pads on no net: FD1.1 FD2.1 FD3.1 FD4.1 J1.A8 J1.B8 J4.NC1 J4.NC2 U1.P$3 U1.P$11 U1.P$17

## Polygon pours and split planes (outlines as drawn)
VIN on Top "Polygon_1_Net_VIN" (solid, remove dead copper, shelved, pour order 0): 18.694,11.074 18.694,13.504 19.135,13.945 19.473,13.945 19.914,13.504 19.914,11.261 19.727,11.074
VSNK on Top "Polygon_1_Net_VSNK" (solid, remove dead copper, shelved, pour order 3): 31.852,11.642 29.633,9.423 20.091,9.423 20.091,13.945 26.458,13.945 27.22,13.183 31.157,13.183 31.852,12.488
SHIELD on Top "Polygon_1_Net_SHIELD" (solid, remove dead copper, shelved, pour order 5): -2.769,18.263 3.404,18.263 3.404,8.407 -2.769,8.407
GND on Top "Polygon_1_Net_GND" (solid, remove dead copper, shelved, pour order 7): -3.277,23.597 32.487,23.597 32.487,3.073 -3.277,3.073
no net on Top Overlay "Polygon_1_NoNet" (solid, shelved, pour order 1): 24.282,17.043 32.487,17.043 32.487,13.36 24.282,13.36
SHIELD on Bottom "Polygon_2_Net_SHIELD" (solid, remove dead copper, shelved, pour order 4): 3.404,18.263 -2.769,18.263 -2.769,8.407 3.404,8.407
GND on Bottom "Polygon_2_Net_GND" (solid, remove dead copper, shelved, pour order 6): -3.277,23.597 32.487,23.597 32.487,3.073 -3.277,3.073
no net on tFinish "Polygon_2_NoNet" (solid, shelved, pour order 2): 32.487,17.043 24.282,17.043 24.282,13.36 32.487,13.36

## Keep-outs
Top:
  lines w0.076: 9.914,13.208 9.914,13.462 ; 11.049,11.946 11.303,11.946 ; 11.303,14.724 11.557,14.724 ; 12.695,13.208 12.695,13.462
Keep-Out Layer:
  the board outline again, w0.203

## Other copper
Bottom:
  text "v10" at -2.667,11.824 h1.08 r270

## Silkscreen, mask and mechanical layers (free items; w line width, h text height)
Top Overlay:
  lines w0.2: -3.175,26.667 cw(c0,26.67) 3.175,26.667 ; -3.175,26.67 -3.175,0 ccw(c0,-0.003) 3.175,0 3.175,3.175 26.035,3.175 26.035,0 ; 3.175,26.67 3.175,23.495 26.035,23.495 26.035,26.67 ; 26.035,0.003 ccw(c29.21,0) 32.385,0.003 ; 26.035,26.667 cw(c29.21,26.67) 32.385,26.667 ; 32.385,0 32.385,26.67
  lines w0.203: 24.892,13.589 22.987,13.589 ; 24.892,16.764 22.987,16.764 ; 24.892,16.942 22.987,16.942 22.987,16.764 ; 25.019,9.931 22.987,9.931 22.987,13.462 ; 31.877,13.462 22.987,13.462 ; 22.987,13.462 22.987,13.589 ; 22.987,13.589 22.987,16.764
Dimension:
  the board outline again, w0.203
Bottom Overlay (Mech26):
  lines w0.203: 24.892,13.589 22.987,13.589 ; 24.892,13.716 22.987,13.716 ; 24.892,16.764 22.987,16.764 ; 24.892,16.942 22.987,16.942 22.987,16.764 ; 31.877,13.462 24.892,13.462 ; 32.385,13.462 32.385,9.931 24.892,9.931 ; 22.987,13.462 22.987,13.589 ; 22.987,13.462 22.987,9.931 24.892,9.931 ; 22.987,13.462 24.892,13.462 ; 22.987,13.589 22.987,13.716 ; 22.987,13.716 22.987,16.764 ; 24.892,9.931 24.892,13.462

## Dimensions
0,26.67 to 0,23.495 on tFinish
3.175,13.335 to 3.175,3.175 on tFinish
29.21,29.845 to 29.21,-3.175 on tFinish
32.385,3.175 to 32.385,13.335 on tFinish
-3.175,3.175 to -3.175,23.495 on tFinish
0,0 to 29.21,0 on tFinish
0,0 to -3.175,0 on tFinish
-3.175,3.175 to 32.385,3.175 on tFinish